# EAGLE board scheme do druku (EAGLE 6.4)
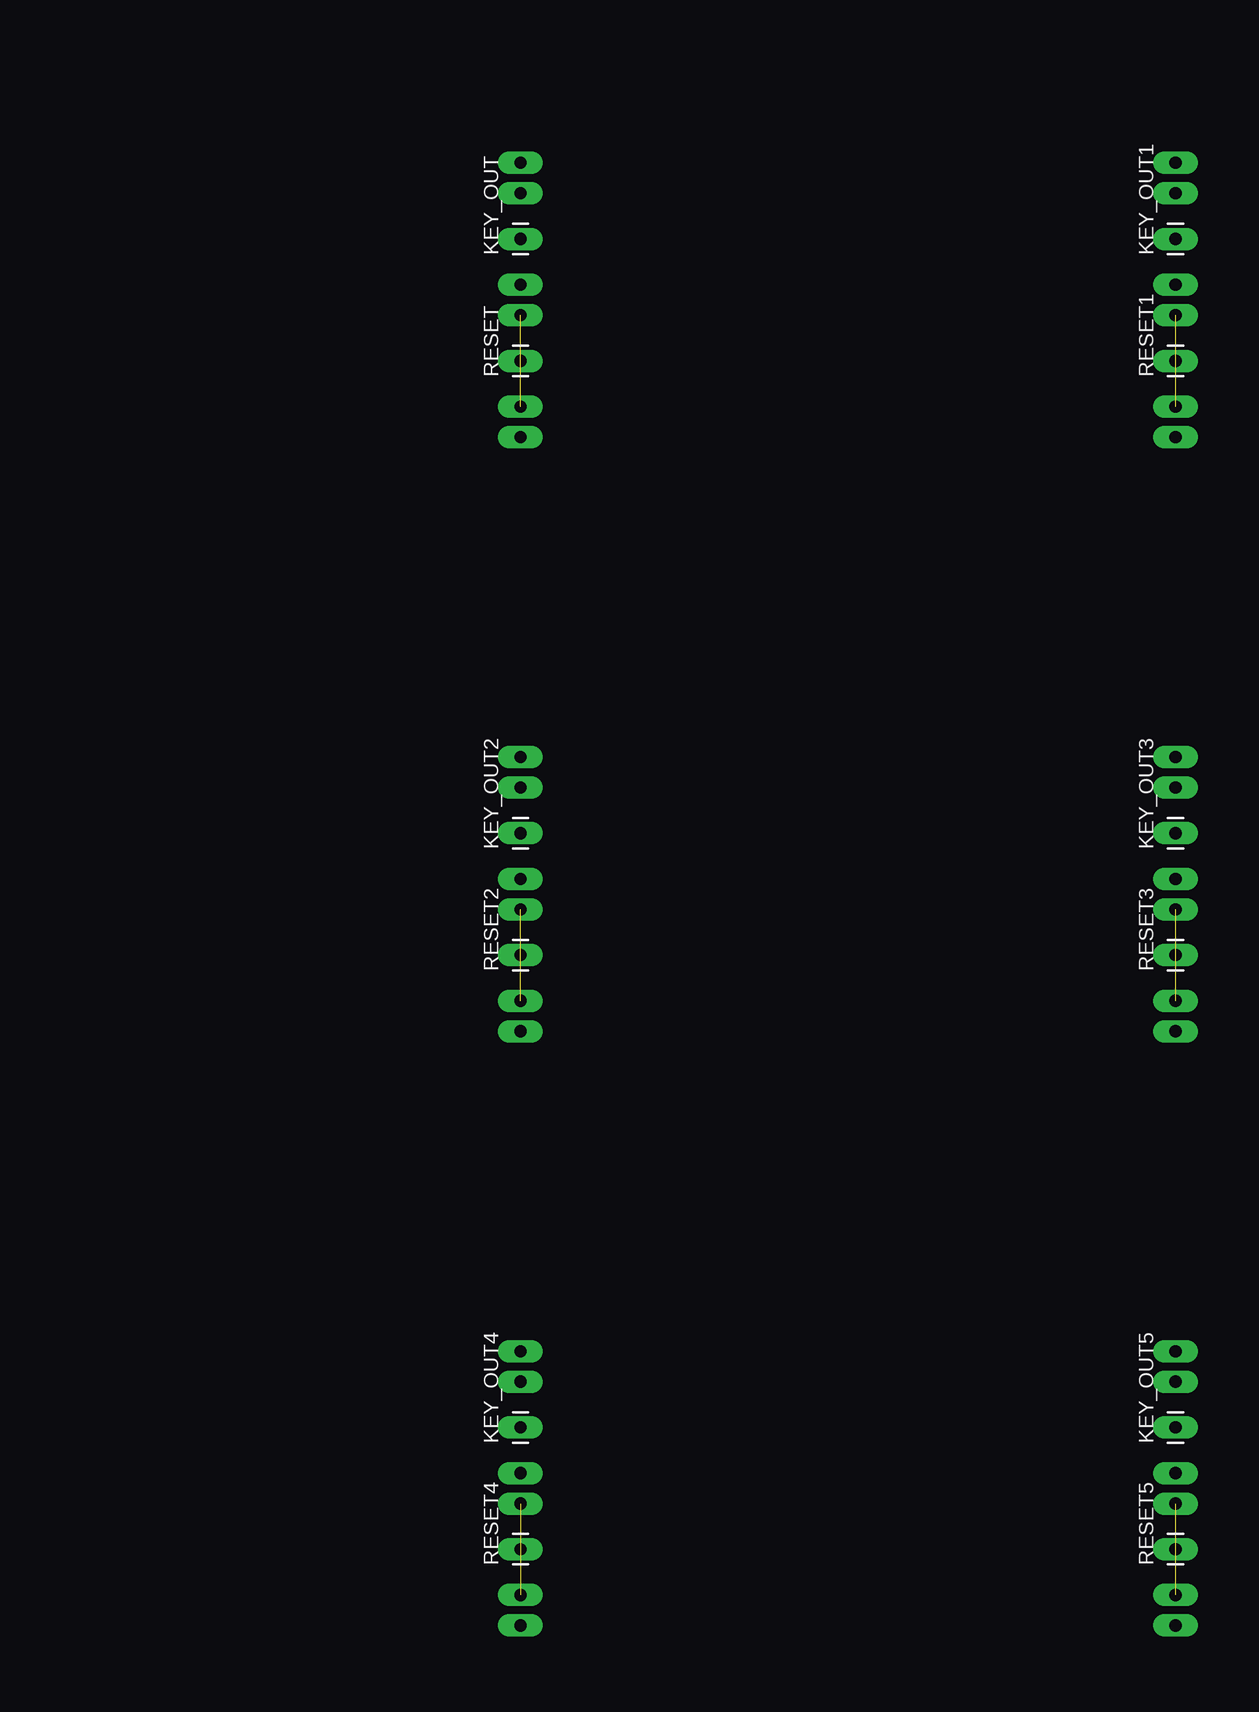
[diagram p0: board, top side]
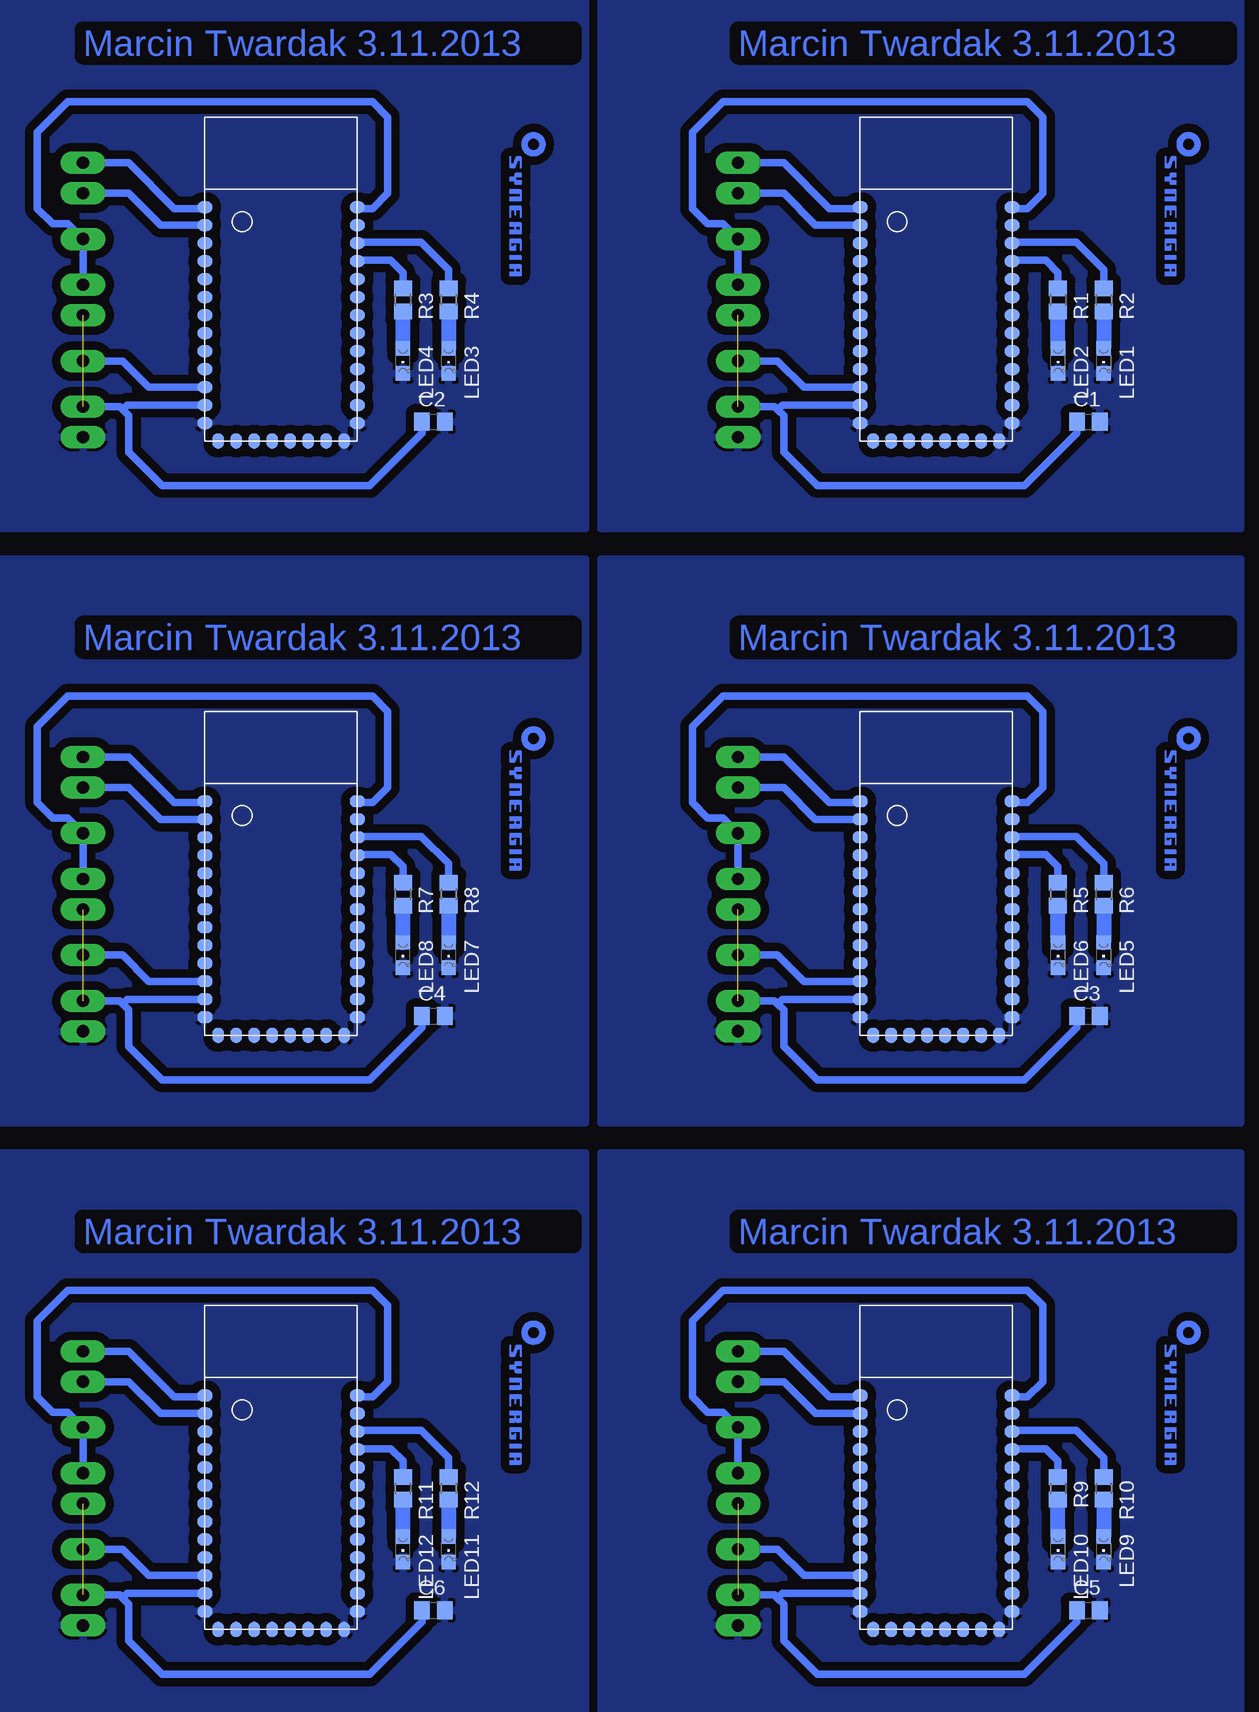
[diagram p1: board, bottom side, seen from below]

No outline drawn. Coordinates in mm, seen from the top.
Copper layers (1*16): Top 0.035mm / dielectric 1.5mm / Bottom 0.035mm
Design rules "default": minimum track width 10mil, minimum drill 24mil, track to track 8mil, track to pad 8mil, pad to pad 8mil, via to via 8mil, smd to smd 8mil, copper to edge 40mil, drill to drill 8mil, minimum pad ring 10mil, minimum via ring 8mil, stop-mask expansion 4mil, vias tented up to drill 0mil, thermal gap 10mil

## Footprints (pad centres in the part's own frame; a part is rotated, then mirrored left to right if it is on the bottom)
C0805 = smd 1.3 x 1.5: 1 -0.95,0; 2 0.95,0
HC-05 = smd 1.27 x 1: 3V3 0,-24; AIO0 0,-19.5; AIO1 0,-21; CTS 0,-10.5; GND@1 0,-25.5; GND@3 12.7,-25.5; PCM_CLK 0,-13.5; PCM_IN 0,-16.5; PCM_OUT 0,-15; PCM_SYNC 0,-18; PIO0 12.7,-24; PIO1 12.7,-22.5; PIO2 12.7,-21; PIO3 12.7,-19.5; PIO4 12.7,-18; PIO5 12.7,-16.5; PIO6 12.7,-15; PIO7 12.7,-13.5; PIO8(LED1) 12.7,-12; PIO9(LED2) 12.7,-10.5; PIO10 12.7,-9; PIO11(KEY) 12.7,-7.5; RESET 0,-22.5; RTS 0,-12; RX 0,-9; TX 0,-7.5 | smd 1 x 1.27: CLK 8.6,-27; CSB 4.1,-27; GND@2 11.6,-27; MISO 7.1,-27; MOSI 5.6,-27; NC 1.1,-27; USB_D+ 10.1,-27; USB_D- 2.6,-27
1X01_LONGPAD = drill 1.016 pad 1.88 long: 1 0,0
1X02_LONGPADS = drill 1.016 pad 1.88 long: 1 0,0; 2 2.54,0
CHIPLED_0805 = smd 1.2 x 1.2: A 0,-1.05; C 0,1.05
R0805 = smd 1.3 x 1.5: 1 -0.95,0; 2 0.95,0

## Placement (x,y rotation side)
C1  100n  [C0805]  12.7,41.91 0 bottom
C2  100n  [C0805]  67.31,41.91 0 bottom
C3  100n  [C0805]  12.7,-7.62 0 bottom
C4  100n  [C0805]  67.31,-7.62 0 bottom
C5  100n  [C0805]  12.7,-57.15 0 bottom
C6  100n  [C0805]  67.31,-57.15 0 bottom
IC1  [HC-05]  31.75,67.31 0 bottom
IC2  [HC-05]  86.36,67.31 0 bottom
IC3  [HC-05]  31.75,17.78 0 bottom
IC4  [HC-05]  86.36,17.78 0 bottom
IC5  [HC-05]  31.75,-31.75 0 bottom
IC6  [HC-05]  86.36,-31.75 0 bottom
KEY_OUT  M01PTH_LONGPAD  [1X01_LONGPAD]  41.91,57.15 90 top
KEY_OUT1  M01PTH_LONGPAD  [1X01_LONGPAD]  96.52,57.15 90 top
KEY_OUT2  M01PTH_LONGPAD  [1X01_LONGPAD]  41.91,7.62 90 top
KEY_OUT3  M01PTH_LONGPAD  [1X01_LONGPAD]  96.52,7.62 90 top
KEY_OUT4  M01PTH_LONGPAD  [1X01_LONGPAD]  41.91,-41.91 90 top
KEY_OUT5  M01PTH_LONGPAD  [1X01_LONGPAD]  96.52,-41.91 90 top
KEY_ZWORKA  [1X02_LONGPADS]  41.91,50.8 90 top
KEY_ZWORKA1  [1X02_LONGPADS]  96.52,50.8 90 top
KEY_ZWORKA2  [1X02_LONGPADS]  41.91,1.27 90 top
KEY_ZWORKA3  [1X02_LONGPADS]  96.52,1.27 90 top
KEY_ZWORKA4  [1X02_LONGPADS]  41.91,-48.26 90 top
KEY_ZWORKA5  [1X02_LONGPADS]  96.52,-48.26 90 top
LED1  RED  [CHIPLED_0805]  11.43,46.99 180 bottom
LED2  GREEN  [CHIPLED_0805]  15.24,46.99 180 bottom
LED3  RED  [CHIPLED_0805]  66.04,46.99 180 bottom
LED4  GREEN  [CHIPLED_0805]  69.85,46.99 180 bottom
LED5  RED  [CHIPLED_0805]  11.43,-2.54 180 bottom
LED6  GREEN  [CHIPLED_0805]  15.24,-2.54 180 bottom
LED7  RED  [CHIPLED_0805]  66.04,-2.54 180 bottom
LED8  GREEN  [CHIPLED_0805]  69.85,-2.54 180 bottom
LED9  RED  [CHIPLED_0805]  11.43,-52.07 180 bottom
LED10  GREEN  [CHIPLED_0805]  15.24,-52.07 180 bottom
LED11  RED  [CHIPLED_0805]  66.04,-52.07 180 bottom
LED12  GREEN  [CHIPLED_0805]  69.85,-52.07 180 bottom
R1  470  [R0805]  15.24,52.07 270 bottom
R2  470  [R0805]  11.43,52.07 270 bottom
R3  470  [R0805]  69.85,52.07 270 bottom
R4  470  [R0805]  66.04,52.07 270 bottom
R5  470  [R0805]  15.24,2.54 270 bottom
R6  470  [R0805]  11.43,2.54 270 bottom
R7  470  [R0805]  69.85,2.54 270 bottom
R8  470  [R0805]  66.04,2.54 270 bottom
R9  470  [R0805]  15.24,-46.99 270 bottom
R10  470  [R0805]  11.43,-46.99 270 bottom
R11  470  [R0805]  69.85,-46.99 270 bottom
R12  470  [R0805]  66.04,-46.99 270 bottom
RESET  M01PTH_LONGPAD  [1X01_LONGPAD]  41.91,46.99 90 top
RESET1  M01PTH_LONGPAD  [1X01_LONGPAD]  96.52,46.99 90 top
RESET2  M01PTH_LONGPAD  [1X01_LONGPAD]  41.91,-2.54 90 top
RESET3  M01PTH_LONGPAD  [1X01_LONGPAD]  96.52,-2.54 90 top
RESET4  M01PTH_LONGPAD  [1X01_LONGPAD]  41.91,-52.07 90 top
RESET5  M01PTH_LONGPAD  [1X01_LONGPAD]  96.52,-52.07 90 top
RX/TX  [1X02_LONGPADS]  41.91,60.96 90 top
RX/TX1  [1X02_LONGPADS]  96.52,60.96 90 top
RX/TX2  [1X02_LONGPADS]  41.91,11.43 90 top
RX/TX3  [1X02_LONGPADS]  96.52,11.43 90 top
RX/TX4  [1X02_LONGPADS]  41.91,-38.1 90 top
RX/TX5  [1X02_LONGPADS]  96.52,-38.1 90 top
SUPPLY  [1X02_LONGPADS]  41.91,43.18 270 top
SUPPLY1  [1X02_LONGPADS]  96.52,43.18 270 top
SUPPLY2  [1X02_LONGPADS]  41.91,-6.35 270 top
SUPPLY3  [1X02_LONGPADS]  96.52,-6.35 270 top
SUPPLY4  [1X02_LONGPADS]  41.91,-55.88 270 top
SUPPLY5  [1X02_LONGPADS]  96.52,-55.88 270 top
U$1  [SYNERGIA_12MM]  6.35,66.04 270 bottom
U$2  [SYNERGIA_12MM]  60.96,66.04 270 bottom
U$3  [SYNERGIA_12MM]  6.35,16.51 270 bottom
U$4  [SYNERGIA_12MM]  60.96,16.51 270 bottom
U$5  [SYNERGIA_12MM]  6.35,-33.02 270 bottom
U$6  [SYNERGIA_12MM]  60.96,-33.02 270 bottom

## Library data of the parts
C1-C6 R1-R12 = rcl
IC1-IC6 = HC-05
KEY_OUT KEY_OUT1-KEY_OUT5 KEY_ZWORKA KEY_ZWORKA1-KEY_ZWORKA5 RESET RESET1-RESET5 RX/TX RX/TX1-RX/TX5 SUPPLY SUPPLY1-SUPPLY5 = SparkFun
LED1-LED12 = led
U$1-U$6 = synergia_logo

## Nets
3.3V: C1.1 IC1.3V3 KEY_ZWORKA.1 SUPPLY.1
3.3V1: C2.1 IC2.3V3 KEY_ZWORKA1.1 SUPPLY1.1
3.3V2: C3.1 IC3.3V3 KEY_ZWORKA2.1 SUPPLY2.1
3.3V3: C4.1 IC4.3V3 KEY_ZWORKA3.1 SUPPLY3.1
3.3V4: C5.1 IC5.3V3 KEY_ZWORKA4.1 SUPPLY4.1
3.3V5: C6.1 IC6.3V3 KEY_ZWORKA5.1 SUPPLY5.1
GND: C1.2 IC1.GND@1 IC1.GND@2 IC1.GND@3 LED1.C LED2.C SUPPLY.2
GND1: C2.2 IC2.GND@1 IC2.GND@2 IC2.GND@3 LED3.C LED4.C SUPPLY1.2
GND2: C3.2 IC3.GND@1 IC3.GND@2 IC3.GND@3 LED5.C LED6.C SUPPLY2.2
GND3: C4.2 IC4.GND@1 IC4.GND@2 IC4.GND@3 LED7.C LED8.C SUPPLY3.2
GND4: C5.2 IC5.GND@1 IC5.GND@2 IC5.GND@3 LED9.C LED10.C SUPPLY4.2
GND5: C6.2 IC6.GND@1 IC6.GND@2 IC6.GND@3 LED11.C LED12.C SUPPLY5.2
N$1: IC1.PIO11(KEY) KEY_OUT.1 KEY_ZWORKA.2
N$2: IC1.PIO8(LED1) R1.1
N$3: IC1.PIO9(LED2) R2.1
N$4: LED2.A R1.2
N$5: LED1.A R2.2
N$6: IC1.RESET RESET.1
N$7: IC1.TX RX/TX.2
N$8: IC1.RX RX/TX.1
N$9: IC2.PIO11(KEY) KEY_OUT1.1 KEY_ZWORKA1.2
N$10: IC2.PIO8(LED1) R3.1
N$11: IC2.PIO9(LED2) R4.1
N$12: LED3.A R4.2
N$13: LED4.A R3.2
N$14: IC2.TX RX/TX1.2
N$15: IC2.RX RX/TX1.1
N$16: IC2.RESET RESET1.1
N$17: IC3.PIO11(KEY) KEY_OUT2.1 KEY_ZWORKA2.2
N$18: IC3.PIO8(LED1) R5.1
N$19: IC3.PIO9(LED2) R6.1
N$20: LED5.A R6.2
N$21: LED6.A R5.2
N$22: IC3.TX RX/TX2.2
N$23: IC3.RX RX/TX2.1
N$24: IC3.RESET RESET2.1
N$25: IC4.PIO11(KEY) KEY_OUT3.1 KEY_ZWORKA3.2
N$26: IC4.PIO8(LED1) R7.1
N$27: IC4.PIO9(LED2) R8.1
N$28: LED7.A R8.2
N$29: LED8.A R7.2
N$30: IC4.TX RX/TX3.2
N$31: IC4.RX RX/TX3.1
N$32: IC4.RESET RESET3.1
N$33: IC5.PIO11(KEY) KEY_OUT4.1 KEY_ZWORKA4.2
N$34: IC5.PIO8(LED1) R9.1
N$35: IC5.PIO9(LED2) R10.1
N$36: LED9.A R10.2
N$37: LED10.A R9.2
N$38: IC5.TX RX/TX4.2
N$39: IC5.RX RX/TX4.1
N$40: IC5.RESET RESET4.1
N$41: IC6.PIO11(KEY) KEY_OUT5.1 KEY_ZWORKA5.2
N$42: IC6.PIO8(LED1) R11.1
N$43: IC6.PIO9(LED2) R12.1
N$44: LED11.A R12.2
N$45: LED12.A R11.2
N$46: IC6.TX RX/TX5.2
N$47: IC6.RX RX/TX5.1
N$48: IC6.RESET RESET5.1

## Tracks (layer width: path | path; a pad name or v marks a point on that pad's centre or on a via)
3.3V  (1 unrouted)
  Bottom 0.61: C1.1 13.65,40.96 18.03,36.58 35.31,36.58 38.1,39.37 38.1,42.42 38.61,42.93 | 38.61,42.93 38.86,43.18 SUPPLY.1 | IC1.3V3 38.22,43.31 38.61,42.93
3.3V1  (1 unrouted)
  Bottom 0.61: C2.1 68.26,40.96 72.64,36.58 89.92,36.58 92.71,39.37 92.71,42.42 93.22,42.93 | 93.22,42.93 93.47,43.18 SUPPLY1.1 | IC2.3V3 92.83,43.31 93.22,42.93
3.3V2  (1 unrouted)
  Bottom 0.61: C3.1 13.65,-8.57 18.03,-12.95 35.31,-12.95 38.1,-10.16 38.1,-7.11 38.61,-6.6 | 38.61,-6.6 38.86,-6.35 SUPPLY2.1 | IC3.3V3 38.22,-6.22 38.61,-6.6
3.3V3  (1 unrouted)
  Bottom 0.61: C4.1 68.26,-8.57 72.64,-12.95 89.92,-12.95 92.71,-10.16 92.71,-7.11 93.22,-6.6 | 93.22,-6.6 93.47,-6.35 SUPPLY3.1 | IC4.3V3 92.83,-6.22 93.22,-6.6
3.3V4  (1 unrouted)
  Bottom 0.61: C5.1 13.65,-58.1 18.03,-62.48 35.31,-62.48 38.1,-59.69 38.1,-56.64 38.61,-56.13 | 38.61,-56.13 38.86,-55.88 SUPPLY4.1 | IC5.3V3 38.22,-55.75 38.61,-56.13
3.3V5  (1 unrouted)
  Bottom 0.61: C6.1 68.26,-58.1 72.64,-62.48 89.92,-62.48 92.71,-59.69 92.71,-56.64 93.22,-56.13 | 93.22,-56.13 93.47,-55.88 SUPPLY5.1 | IC6.3V3 92.83,-55.75 93.22,-56.13
GND
  pour Bottom (isolate 0.711): 0,80.01 0,33.02 53.34,33.02 53.34,80.01
GND1
  pour Bottom (isolate 0.711): 54.61,80.01 54.61,33.02 107.95,33.02 107.95,80.01
GND2
  pour Bottom (isolate 0.711): 0,30.48 0,-16.51 53.34,-16.51 53.34,30.48
GND3
  pour Bottom (isolate 0.711): 54.61,30.48 54.61,-16.51 107.95,-16.51 107.95,30.48
GND4
  pour Bottom (isolate 0.711): 0,-19.05 0,-66.04 53.34,-66.04 53.34,-19.05
GND5
  pour Bottom (isolate 0.711): 54.61,-19.05 54.61,-66.04 107.95,-66.04 107.95,-19.05
N$1
  Bottom 0.61: KEY_ZWORKA.2 KEY_OUT.1 43.18,58.42 44.45,58.42 45.72,59.69 45.72,66.04 43.18,68.58 17.78,68.58 16.51,67.31 16.51,60.96 17.78,59.69 18.93,59.69 IC1.PIO11(KEY)
N$2
  Bottom 0.61: R1.1 15.24,54.36 16.26,55.37 18.99,55.37 IC1.PIO8(LED1)
N$3
  Bottom 0.61: R2.1 11.43,54.61 13.72,56.9 18.96,56.9 IC1.PIO9(LED2)
N$4
  Bottom 1.27: LED2.A R1.2
N$5
  Bottom 1.27: R2.2 LED1.A
N$6
  Bottom 0.61: IC1.RESET 36.43,44.81 38.61,46.99 RESET.1
N$7
  Bottom 0.61: IC1.TX 31.87,59.69 34.29,59.69 38.1,63.5 RX/TX.2
N$8
  Bottom 0.61: RX/TX.1 38.1,60.96 35.45,58.31 IC1.RX
N$9
  Bottom 0.61: KEY_ZWORKA1.2 KEY_OUT1.1 97.79,58.42 99.06,58.42 100.33,59.69 100.33,66.04 97.79,68.58 72.39,68.58 71.12,67.31 71.12,60.96 72.39,59.69 73.54,59.69 IC2.PIO11(KEY)
N$10
  Bottom 0.61: R3.1 69.85,54.36 70.87,55.37 73.6,55.37 IC2.PIO8(LED1)
N$11
  Bottom 0.61: R4.1 66.04,54.61 68.33,56.9 73.57,56.9 IC2.PIO9(LED2)
N$12
  Bottom 1.27: R4.2 LED3.A
N$13
  Bottom 1.27: LED4.A R3.2
N$14
  Bottom 0.61: IC2.TX 86.48,59.69 88.9,59.69 92.71,63.5 RX/TX1.2
N$15
  Bottom 0.61: RX/TX1.1 92.71,60.96 90.06,58.31 IC2.RX
N$16
  Bottom 0.61: IC2.RESET 91.04,44.81 93.22,46.99 RESET1.1
N$17
  Bottom 0.61: KEY_ZWORKA2.2 KEY_OUT2.1 43.18,8.89 44.45,8.89 45.72,10.16 45.72,16.51 43.18,19.05 17.78,19.05 16.51,17.78 16.51,11.43 17.78,10.16 18.93,10.16 IC3.PIO11(KEY)
N$18
  Bottom 0.61: R5.1 15.24,4.83 16.26,5.84 18.99,5.84 IC3.PIO8(LED1)
N$19
  Bottom 0.61: R6.1 11.43,5.08 13.72,7.37 18.96,7.37 IC3.PIO9(LED2)
N$20
  Bottom 1.27: R6.2 LED5.A
N$21
  Bottom 1.27: LED6.A R5.2
N$22
  Bottom 0.61: IC3.TX 31.87,10.16 34.29,10.16 38.1,13.97 RX/TX2.2
N$23
  Bottom 0.61: RX/TX2.1 38.1,11.43 35.45,8.78 IC3.RX
N$24
  Bottom 0.61: IC3.RESET 36.43,-4.72 38.61,-2.54 RESET2.1
N$25
  Bottom 0.61: KEY_ZWORKA3.2 KEY_OUT3.1 97.79,8.89 99.06,8.89 100.33,10.16 100.33,16.51 97.79,19.05 72.39,19.05 71.12,17.78 71.12,11.43 72.39,10.16 73.54,10.16 IC4.PIO11(KEY)
N$26
  Bottom 0.61: R7.1 69.85,4.83 70.87,5.84 73.6,5.84 IC4.PIO8(LED1)
N$27
  Bottom 0.61: R8.1 66.04,5.08 68.33,7.37 73.57,7.37 IC4.PIO9(LED2)
N$28
  Bottom 1.27: R8.2 LED7.A
N$29
  Bottom 1.27: LED8.A R7.2
N$30
  Bottom 0.61: IC4.TX 86.48,10.16 88.9,10.16 92.71,13.97 RX/TX3.2
N$31
  Bottom 0.61: RX/TX3.1 92.71,11.43 90.06,8.78 IC4.RX
N$32
  Bottom 0.61: IC4.RESET 91.04,-4.72 93.22,-2.54 RESET3.1
N$33
  Bottom 0.61: KEY_ZWORKA4.2 KEY_OUT4.1 43.18,-40.64 44.45,-40.64 45.72,-39.37 45.72,-33.02 43.18,-30.48 17.78,-30.48 16.51,-31.75 16.51,-38.1 17.78,-39.37 18.93,-39.37 IC5.PIO11(KEY)
N$34
  Bottom 0.61: R9.1 15.24,-44.7 16.26,-43.69 18.99,-43.69 IC5.PIO8(LED1)
N$35
  Bottom 0.61: R10.1 11.43,-44.45 13.72,-42.16 18.96,-42.16 IC5.PIO9(LED2)
N$36
  Bottom 1.27: R10.2 LED9.A
N$37
  Bottom 1.27: LED10.A R9.2
N$38
  Bottom 0.61: IC5.TX 31.87,-39.37 34.29,-39.37 38.1,-35.56 RX/TX4.2
N$39
  Bottom 0.61: RX/TX4.1 38.1,-38.1 35.45,-40.75 IC5.RX
N$40
  Bottom 0.61: IC5.RESET 36.43,-54.25 38.61,-52.07 RESET4.1
N$41
  Bottom 0.61: KEY_ZWORKA5.2 KEY_OUT5.1 97.79,-40.64 99.06,-40.64 100.33,-39.37 100.33,-33.02 97.79,-30.48 72.39,-30.48 71.12,-31.75 71.12,-38.1 72.39,-39.37 73.54,-39.37 IC6.PIO11(KEY)
N$42
  Bottom 0.61: R11.1 69.85,-44.7 70.87,-43.69 73.6,-43.69 IC6.PIO8(LED1)
N$43
  Bottom 0.61: R12.1 66.04,-44.45 68.33,-42.16 73.57,-42.16 IC6.PIO9(LED2)
N$44
  Bottom 1.27: R12.2 LED11.A
N$45
  Bottom 1.27: LED12.A R11.2
N$46
  Bottom 0.61: IC6.TX 86.48,-39.37 88.9,-39.37 92.71,-35.56 RX/TX5.2
N$47
  Bottom 0.61: RX/TX5.1 92.71,-38.1 90.06,-40.75 IC6.RX
N$48
  Bottom 0.61: IC6.RESET 91.04,-54.25 93.22,-52.07 RESET5.1

## Text on the board
Bottom: Marcin Twardak 3.11.2013 | Marcin Twardak 3.11.2013 | Marcin Twardak 3.11.2013 | Marcin Twardak 3.11.2013 | Marcin Twardak 3.11.2013 | Marcin Twardak 3.11.2013